# Altium PCB SDCARD.pcbdoc
Units mm, origin at the board's own origin, x right, y up, seen from the top; angles counter-clockwise.
Board outline 42.1 x 42.07 mm, 2 copper layers (Top Layer, Bottom Layer); 1 components, 0 nets, 15 pads, 0 vias.
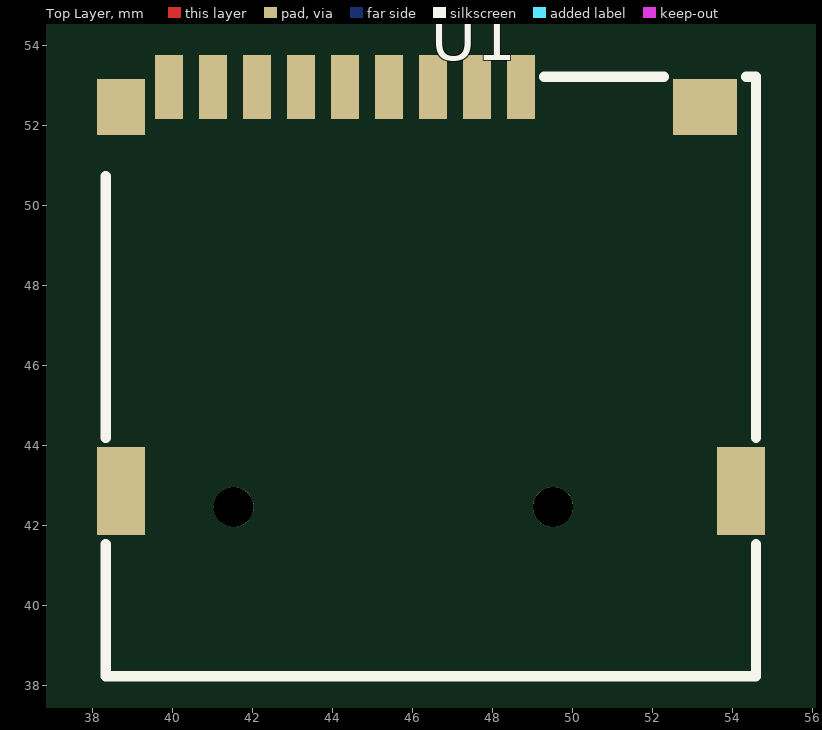
[diagram p0: Top Layer view]
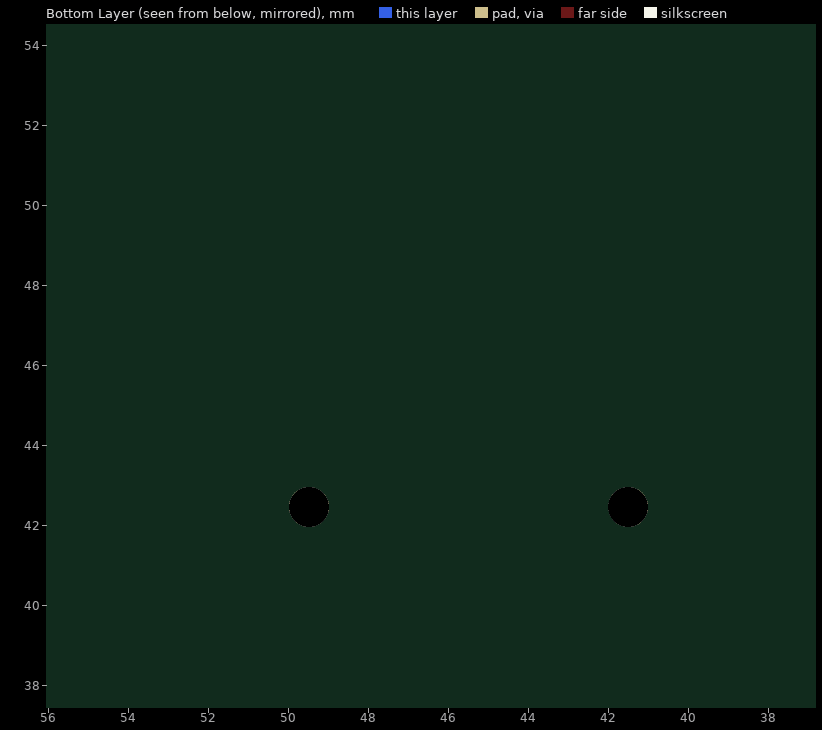
[diagram p1: Bottom Layer view, seen from below]

## Layer stack, top to bottom
Top Layer: signal copper (thickness not stored)
Dielectric: dielectric 0.32, FR-4, Dk 4.8
Bottom Layer: signal copper (thickness not stored)

## Board outline
67.5,25.4 25.4,25.4 25.4,67.47 67.5,67.47

## Components (designator, comment, footprint, x,y, rotation, side; value= is the part's Value field where it differs from the comment)
U1 "TF-SMD_TF-CARD-H1.8" TF-SMD_TF-CARD-H1.8 46.45,47.909 r0 top

## Footprints (in the part's own frame and the unit in brackets; to place one, negate y for a bottom-side part, rotate by r counter-clockwise, add the part's x,y. Pads: shape width x height; smd on the part's side, far side on the other; paste and mask are expansions set on the pad)
TF-SMD_TF-CARD-H1.8 [mm]
  rect 0.7x1.6 smd paste+0 mask+0.05: 1(2.25,5.05) 2(1.15,5.05) 3(0.05,5.05) 4(-1.05,5.05) 5(-2.15,5.05) 6(-3.25,5.05) 7(-4.35,5.05) 8(-5.45,5.05) 9(-6.55,5.05)
  rect 1.2x1.4 smd paste+0 mask+0.05: 10(-7.747,4.55)
  rect 1.2x2.2 smd paste+0 mask+0.05: 11(-7.75,-5.05) 12(7.75,-5.05)
  rect 1.6x1.4 smd paste+0 mask+0.05: 13(6.85,4.55)
  round 1 hole 1 unplated paste+0: ""(-4.93,-5.45) ""(3.05,-5.45)
  silkscreen extent -8.13,-9.68 8.13,5.3

## Nets (pads, with @x,y where several pads share a name; then routed paths per layer and width w, separated by ;. In a path a pad name is that pad's centre, name@x,y a point inside that pad or via, vN(x,y) a via of type N, cw(c..) or ccw(c..) an arc to the next point about the centre after c; other vN are vias at no path point)
pads on no net: U1. U1.1 U1.2 U1.3 U1.4 U1.5 U1.6 U1.7 U1.8 U1.9 U1.10 U1.11 U1.12 U1.13